# EAGLE board source_eagle (EAGLE 9.6.2)
REV: B
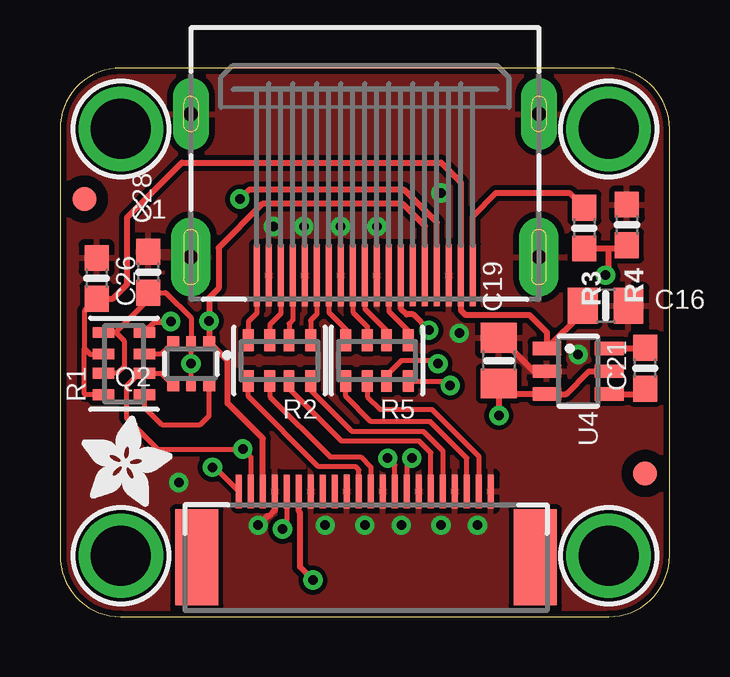
[diagram p0: board, top side]
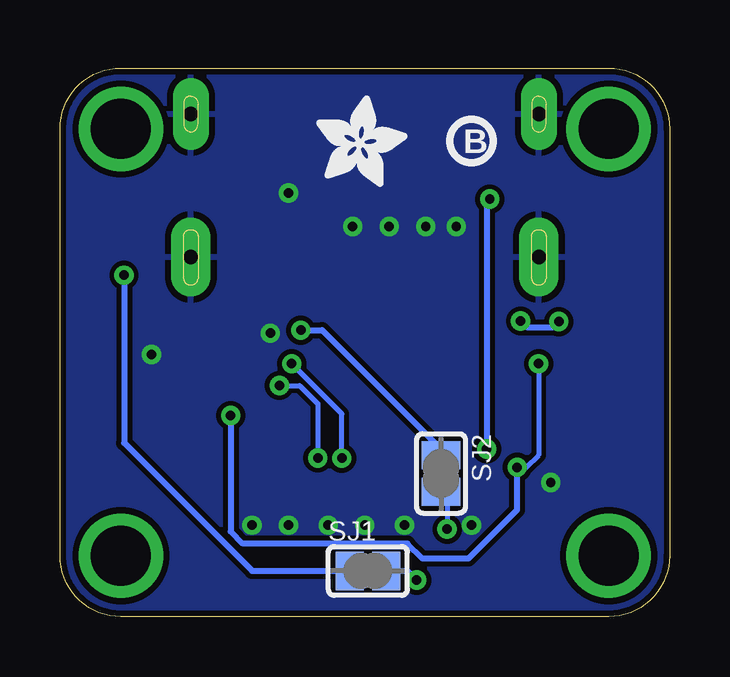
[diagram p1: board, bottom side, seen from below]

Size 25.4 x 22.86 mm. Coordinates in mm from the lower left corner, seen from the top.
Outline: 0,20.32 0,2.54 arc90 2.54,0 22.86,0 arc90 25.4,2.54 25.4,20.32 arc90 22.86,22.86 2.54,22.86 arc90 0,20.32
Copper layers (1*16): Top 0.035mm / dielectric 1.5mm / Bottom 0.035mm
Design rules "adafruit 8-8": minimum track width 6mil, minimum drill 15.5mil, track to track 8mil, track to pad 8mil, pad to pad 8mil, via to via 8mil, smd to smd 8mil, copper to edge 10mil, drill to drill 8mil, minimum pad ring 10mil, minimum via ring 8mil, stop-mask expansion 2mil, vias tented up to drill 20mil, thermal gap 10mil
Net classes: 1 power: width 0.305 mm, drill 0.381 mm

## Footprints (pad centres in the part's own frame; a part is rotated, then mirrored left to right if it is on the bottom)
0805-NO = smd 1.24 x 1.5: 1 -0.95,0; 2 0.95,0
0603-NO = smd 1.075 x 1: 1 -0.85,0; 2 0.85,0
FPC_22PIN = smd 0.25 x 1.4: 1 -5.25,-1.154; 2 -4.75,-1.154; 3 -4.25,-1.154; 4 -3.75,-1.154; 5 -3.25,-1.154; 6 -2.75,-1.154; 7 -2.25,-1.154; 8 -1.75,-1.154; 9 -1.25,-1.154; 10 -0.75,-1.154; 11 -0.25,-1.154; 12 0.25,-1.154; 13 0.75,-1.154; 14 1.25,-1.154; 15 1.75,-1.154; 16 2.25,-1.154; 17 2.75,-1.154; 18 3.25,-1.154; 19 3.75,-1.154; 20 4.25,-1.154; 21 4.75,-1.154; 22 5.25,-1.154 | smd 1.8 x 4: SUPPORT1 7,1.598; SUPPORT2 -7.1,1.598
FIDUCIAL_1MM = smd 1 x 1: 1 0,0
SOT363 = smd 0.5 x 0.5: 1 -0.75,-0.9; 3 0.75,-0.9; 4 0.75,0.9; 6 -0.75,0.9 | smd 0.4 x 0.5: 2 0,-0.9; 5 0,0.9
RESPACK_4X0603 = smd 0.45 x 0.9: 1 -1.3,-0.85; 2 -0.4,-0.85; 3 0.4,-0.85; 4 1.3,-0.85; 5 1.3,0.85; 6 0.4,0.85; 7 -0.4,0.85; 8 -1.3,0.85
SOLDERJUMPER_CLOSEDWIRE = smd 1.168 x 1.6: 1 -0.762,0; 2 0.762,0 | smd 0.635 x 0.203: WIRE 0,0
SOT23-6 = smd 0.55 x 1.2: 1 -0.95,-1.3; 2 0,-1.3; 3 0.95,-1.3; 4 0.95,1.3; 5 0,1.3; 6 -0.95,1.3
MOUNTINGHOLE_2.5_PLATED = drill 2.5 pad 3.2: P$1 0,0
HDMI_MOLEX_47151-0001 = smd 0.25 x 2.6: 1 4.5,3.302; 2 4,3.302; 3 3.5,3.302; 4 3,3.302; 5 2.5,3.302; 6 2,3.302; 7 1.5,3.302; 8 1,3.302; 9 0.5,3.302; 10 0,3.302; 11 -0.5,3.302; 12 -1,3.302; 13 -1.5,3.302; 14 -2,3.302; 15 -2.5,3.302; 16 -3,3.302; 17 -3.5,3.302; 18 -4,3.302; 19 -4.5,3.302 | drill 0.6 pad 1.65 long: P$1 -7.25,2.542; P$2 7.25,2.542 | drill 0.6 pad 1.5 long: P$3 7.25,-3.418; P$4 -7.25,-3.418

## Placement (x,y rotation side)
C16  10uF/16V  [0805-NO]  22.73,12.95 0 top
C19  10uF/16V  [0805-NO]  18.29,10.67 90 top
C21  1uF/25V  [0603-NO]  24.38,10.35 90 top
C26  0.1uF  [0603-NO]  1.52,14.1 270 top
C28  0.1uF  [0603-NO]  3.68,14.35 90 top
CN1  22p BOTTOM 0.5mm FPC  [FPC_22PIN]  12.7,4.06 180 top
FID1  FIDUCIAL_1MM  [FIDUCIAL_1MM]  1.02,17.4 0 top
FID2  FIDUCIAL_1MM  [FIDUCIAL_1MM]  24.38,5.97 0 top
PLABEL0  [PLABEL0]  18.67,5.02 0 top
PLABEL1  [PLABEL1]  1.97,16.7 0 top
PLABEL2  [PLABEL2]  12.7,11.87 0 bottom
PLABEL3  [PLABEL3]  16.07,1.97 0 bottom
PLABEL4  [PLABEL4]  11.37,6.16 90 bottom
Q2  BSS138  [SOT363]  5.46,10.54 180 top
R1  10K  [RESPACK_4X0603]  2.67,10.54 90 top
R2  220 Pack  [RESPACK_4X0603]  9.14,10.67 180 top
R3  100K  [0603-NO]  21.84,16.19 270 top
R4  100K  [0603-NO]  23.62,16.32 270 top
R5  220 Pack  [RESPACK_4X0603]  13.21,10.67 180 top
SJ1  [SOLDERJUMPER_CLOSEDWIRE]  12.57,1.91 0 bottom
SJ2  [SOLDERJUMPER_CLOSEDWIRE]  9.53,5.97 270 bottom
U4  AP3602  [SOT23-6]  21.59,10.22 270 top
U$2  MOUNTINGHOLE2.5  [MOUNTINGHOLE_2.5_PLATED]  2.54,20.32 0 top
U$3  MOUNTINGHOLE2.5  [MOUNTINGHOLE_2.5_PLATED]  22.86,20.32 0 top
U$4  [ADAFRUIT_3.5MM]  0.89,4.57 0 top
U$5  MOUNTINGHOLE2.5  [MOUNTINGHOLE_2.5_PLATED]  2.54,2.54 0 top
U$6  [PCBFEAT-REV-040]  8.26,19.81 0 bottom
U$7  MOUNTINGHOLE2.5  [MOUNTINGHOLE_2.5_PLATED]  22.86,2.54 0 top
U$21  [ADAFRUIT_3.5MM]  14.73,17.91 0 bottom
X1  47151-0001  [HDMI_MOLEX_47151-0001]  12.7,17.53 180 top

## Library data of the parts
C16 C19 C21 C26 C28 R1-R5 SJ1 SJ2 U4 U$4 U$21 = microbuilder
CN1 = adafruit_electromech
FID1 FID2 = microbuilder; BOM: EXCLUDE
PLABEL0 PLABEL1-PLABEL4 = pinguin
Q2 = microbuilder; JLC_ROTATION: 270
U$2 U$3 U$5 U$7 = adafruit_electromech; BOM: EXCLUDE
U$6 = microbuilder; REV: B
X1 = adafruit_electromech; LCSC: C138388

## Nets
3.3V: C19.1 C28.1 CN1.22 Q2.2 Q2.5 R1.5 R1.7 U4.3 U4.5
5.0V: C16.1 C26.2 R1.6 R1.8 U4.1 X1.18
CEC: SJ2.1 X1.13
GND: C16.2 C19.2 C26.1 C28.2 CN1.1 CN1.4 CN1.7 CN1.10 CN1.13 CN1.16 CN1.19 R4.1 U4.2 X1.2 X1.5 X1.8 X1.11 X1.17 X1.P$1 X1.P$2 X1.P$3 X1.P$4
HDMI_TX0+: R5.4 X1.7
HDMI_TX0-: R5.3 X1.9
HDMI_TX1+: R2.2 X1.4
HDMI_TX1-: R2.1 X1.6
HDMI_TX2+: R2.4 X1.1
HDMI_TX2-: R2.3 X1.3
HDMI_TXC+: R5.2 X1.10
HDMI_TXC-: R5.1 X1.12
HOTPLUG: R3.1 X1.19
HOTPLUG_3V: R3.2 R4.2 SJ1.1
HSTX12: CN1.12 R2.5
HSTX13: CN1.11 R2.6
HSTX14: CN1.9 R5.7
HSTX15: CN1.8 R5.8
HSTX16: CN1.6 R2.7
HSTX17: CN1.5 R2.8
HSTX18: CN1.3 R5.5
HSTX19: CN1.2 R5.6
N$1: CN1.17 SJ1.2
N$2: CN1.18 SJ2.2
N$8: C21.1 U4.4
N$9: C21.2 U4.6
SCL: CN1.20 Q2.1 R1.4 X1.15
SCL_5V: Q2.6 R1.1
SDA: CN1.21 Q2.4 R1.2 X1.16
SDA_5V: Q2.3 R1.3

## Tracks (layer width: path | path; a pad name or v marks a point on that pad's centre or on a via)
3.3V  (via drill 0.39)
  Top 0.203: R1.5 2.32,11.84 | 2.32,11.84 3.68,13.21 C28.1 4.41,13.5 5.46,12.45 Q2.2 v5.46,10.54 Q2.5 | 2.32,11.84 2.67,11.49 2.67,10.41 2.39,10.14 R1.7 | v6.35,6.22 6.45,6.22 CN1.22
  Top 0.254: U4.5 22.04,10.22 21.08,9.27 U4.3 18.73,9.27 C19.1 v18.29,8.38
  Bottom 0.203: v5.46,10.54 5.46,6.73 5.97,6.22 v6.35,6.22
  Bottom 0.254: v18.29,8.38 18.29,3.56 17.78,3.05 10.92,3.05 10.29,2.41 8.38,2.41 6.35,4.45 v6.35,6.22
5.0V
  Top 0.203: C26.2 1.02,12.74 1.02,11.18 | R1.6 1.25,10.94 1.02,11.18 | R1.8 1.05,9.24 1.02,9.27 1.02,11.18
  Top 0.254: C16.1 21.78,12.67 U4.1 20.29,11.84 19.56,12.57 16.89,12.57 16.7,12.76 X1.18 16.7,18.1 15.88,18.92 5.08,18.92 2.79,16.64 2.79,13.84 2.2,13.25 C26.2
CEC  (via drill 0.39)
  Top 0.254: v15.37,11.94 14.71,12.59 14.44,12.59 14.2,12.83 X1.13
  Bottom 0.254: v15.37,11.94 14.48,11.94 9.53,6.99 SJ2.1
GND  (via drill 0.39)
  Top 0.254: U4.2 19.75,10.22 18.35,11.62 C19.2 | v8.26,3.81 8.63,4.19 8.71,4.19 8.95,4.43 CN1.19
  other vias: 21.59,10.92 16.64,11.81 13.21,16.26 11.68,16.26 10.16,16.26 8.89,16.26 15.88,17.65 11.05,3.81 12.7,3.81 15.88,3.81 14.22,3.81 17.4,3.81 4.95,5.59
  pour Top: 0,22.86 25.4,22.86 25.4,0 0,0
  pour Bottom: 0,22.86 25.4,22.86 25.4,0 0,0
HDMI_TX0+
  Top 0.203: X1.7 11.2,12.68 11.91,11.97 R5.4
HDMI_TX0-
  Top 0.203: X1.9 12.2,12.69 12.81,12.08 R5.3
HDMI_TX1+
  Top 0.203: X1.4 9.7,12.37 9.54,12.21 R2.2
HDMI_TX1-
  Top 0.203: X1.6 10.7,12.61 10.44,12.35 R2.1
HDMI_TX2+
  Top 0.203: X1.1 8.2,12.64 7.84,12.29 R2.4
HDMI_TX2-
  Top 0.203: X1.3 9.2,12.63 8.74,12.17 R2.3
HDMI_TXC+
  Top 0.203: X1.10 12.7,12.83 13.61,11.92 R5.2
HDMI_TXC-
  Top 0.203: X1.12 13.7,12.72 14.51,11.91 R5.1
HOTPLUG
  Top 0.254: X1.19 17.2,16.69 18.16,17.65 21.23,17.65 R3.1
HOTPLUG_3V  (via drill 0.39)
  Top 0.254: R3.2 22.86,15.34 | 22.86,15.34 23.5,15.34 R4.2 | v22.73,14.23 22.86,14.35 22.86,15.34
  Bottom 0.254: v22.73,14.23 22.73,7.24 17.4,1.91 SJ1.1
HSTX12
  Top 0.203: CN1.12 12.45,6.12 12.32,6.25 10.77,6.25 7.84,9.17 R2.5
HSTX13
  Top 0.203: R2.6 8.74,9.16 11.25,6.66 12.52,6.66 12.95,6.23 CN1.11
HSTX14  (via drill 0.39)
  Top 0.203: CN1.9 13.95,6.31 v13.65,6.6 | v15.75,10.54 15.62,10.67 14.22,10.67 13.61,10.05 R5.7
  Bottom 0.203: v13.65,6.6 13.65,8.45 v15.75,10.54
HSTX15  (via drill 0.39)
  Top 0.203: R5.8 16.07,9.82 v16.26,9.63 | v14.66,6.61 14.45,6.4 CN1.8
  Bottom 0.203: v16.26,9.63 15.41,9.63 14.66,8.88 v14.66,6.61
HSTX16
  Top 0.203: CN1.6 15.45,6.83 14.97,7.32 11.73,7.32 9.54,9.51 R2.7
HSTX17
  Top 0.203: R2.8 10.44,9.44 12.16,7.72 15.14,7.72 15.95,6.91 CN1.5
HSTX18
  Top 0.203: CN1.3 16.95,6.61 15.43,8.13 12.95,8.13 11.91,9.17 R5.5
HSTX19
  Top 0.203: R5.6 12.81,9.16 13.34,8.64 15.49,8.64 17.45,6.68 CN1.2
N$1  (via drill 0.39)
  Top 0.254: v10.54,1.52 10,2.06 10,4.33 9.95,4.39 CN1.17
  Bottom 0.254: v10.54,1.52 10.92,1.91 SJ1.2
N$2  (via drill 0.39)
  Top 0.203: CN1.18 9.45,3.83 v9.27,3.65
  Bottom 0.203: SJ2.2 9.27,4.95 v9.27,3.65
N$8
  Top 0.254: U4.4 24.16,9.27 C21.1
N$9
  Top 0.254: U4.6 24.36,11.17 C21.2
SCL  (via drill 0.39)
  Top 0.254: X1.15 15.2,16.28 14.29,17.2 8.43,17.2 6.61,15.37 6.61,13.68 6.21,13.29 v6.21,12.32 Q2.1 6.99,10.67 6.99,8.89 8.45,7.42 CN1.20 | R1.4 3.97,12.29 v4.62,12.29
  Bottom 0.254: v6.21,12.32 5.96,12.06 4.84,12.06 v4.62,12.29
SCL_5V
  Top 0.203: R1.1 3.52,8.73 4.25,8 5.84,8 6.21,8.37 Q2.6
SDA  (via drill 0.39)
  Top 0.203: Q2.4 4.21,10.14 R1.2 3.31,10.14 2.76,9.59 2.76,8.29 4.06,6.99 v7.62,6.99 7.95,6.66 CN1.21
  Top 0.254: X1.16 15.7,16.43 14.35,17.78 7.87,17.78 v7.49,17.4
  Bottom 0.254: v7.49,17.4 7.62,17.4 v7.62,6.99
SDA_5V
  Top 0.203: Q2.3 4.21,10.94 R1.3

## Text on the board
Pinguin_tBackup: DVI | 22-pin / HSTX
Pinguin_bBackup: RP2350 / 22-pin HSTX / to DVI Out | CEC | HPD